# EAGLE board Geiger_old (EAGLE 5.06)
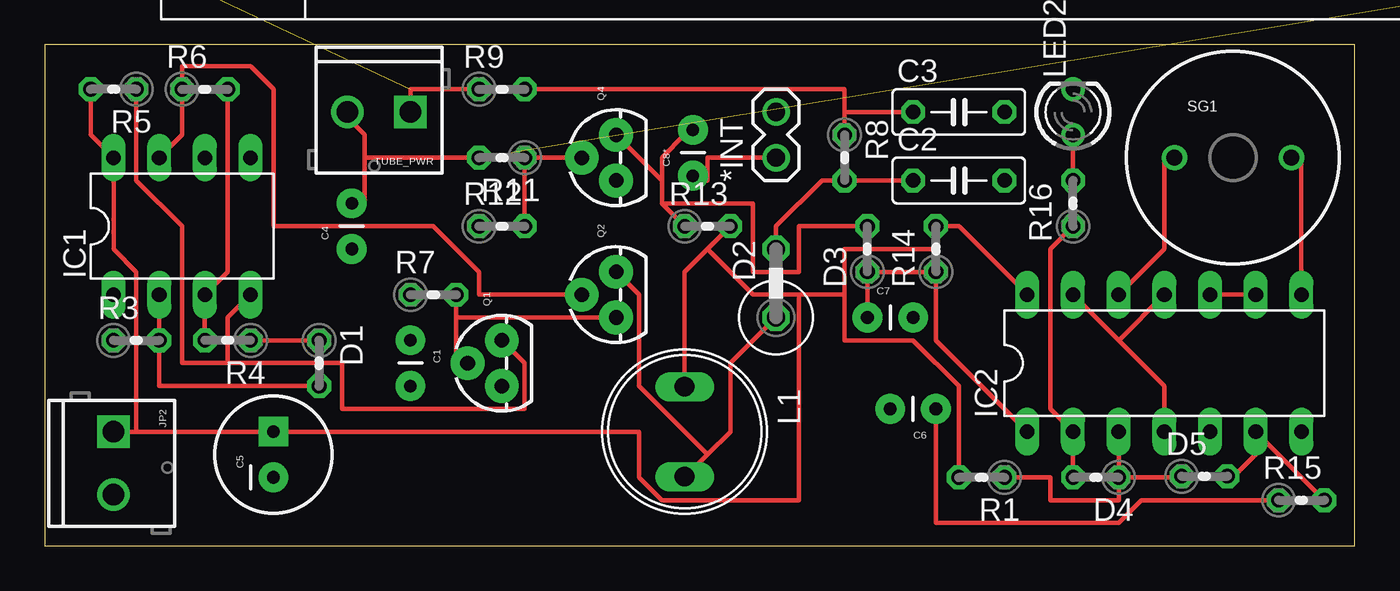
[diagram p0: board, top side]
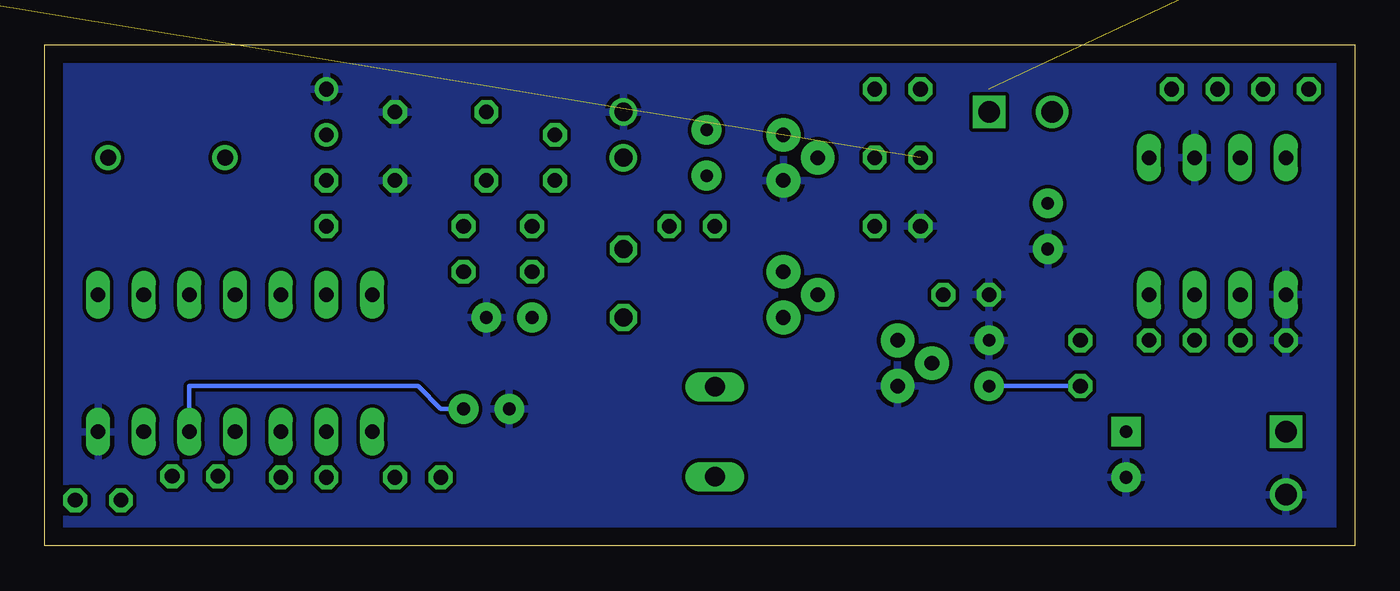
[diagram p1: board, bottom side, seen from below]

Size 72.8 x 27.86 mm. Coordinates in mm from the lower left corner, seen from the top.
Outline: 0,0 72.8,0 72.8,27.86 0,27.86 0,0
Copper layers (1*16): Top 0.035mm / dielectric 1.5mm / Bottom 0.035mm
Design rules "default": minimum track width 10mil, minimum drill 24mil, track to track 8mil, track to pad 8mil, pad to pad 8mil, via to via 8mil, smd to smd 8mil, copper to edge 40mil, drill to drill 8mil, minimum pad ring 10mil, minimum via ring 8mil, stop-mask expansion 4mil, vias tented up to drill 0mil, thermal gap 10mil

## Footprints (pad centres in the part's own frame; a part is rotated, then mirrored left to right if it is on the bottom)
1X02 = drill 1.016 round: 1 0,0; 2 2.54,0
CAP-PTH-SMALL = drill 0.7 pad 1.651 round: 1 0,0; 2 2.54,0
C050-025X075 = drill 0.813 octagon: 1 -2.54,0; 2 2.54,0
CPOL-RADIAL-100UF-25V = drill 0.7 pad 1.651 square: 1 1.27,0 | drill 0.7 pad 1.651 round: 2 -1.27,0
0204V = drill 0.813 octagon: 1 -1.27,0; 2 1.27,0
VERT_DIODE = drill 1 octagon: 1 -2.54,0; 2 1.27,0
GEIGER_TUBE_SBM-20 = smd 6.35 x 3.81: + -48.26,2.54; - 52.07,2.54
DIL08 = drill 0.813 long: 1 -3.81,-3.81; 2 -1.27,-3.81; 3 1.27,-3.81; 4 3.81,-3.81; 5 3.81,3.81; 6 1.27,3.81; 7 -1.27,3.81; 8 -3.81,3.81
DIL14 = drill 0.813 long: 1 -7.62,-3.81; 2 -5.08,-3.81; 3 -2.54,-3.81; 4 0,-3.81; 5 2.54,-3.81; 6 5.08,-3.81; 7 7.62,-3.81; 8 7.62,3.81; 9 5.08,3.81; 10 2.54,3.81; 11 0,3.81; 12 -2.54,3.81; 13 -5.08,3.81; 14 -7.62,3.81
SCREWTERMINAL-3.5MM-2 = drill 1.2 square: 1 0,0 | drill 1.2 round: 2 3.5,0
.32IN_RADIAL = drill 1.1 long: 1 -2.5,0; 2 2.5,0
LED3MM = drill 0.813 round: A -1.27,0; K 1.27,0
TO-92 = drill 0.813 pad 1.88 round: 1 -1.27,0; 2 0,1.905; 3 1.27,0
BUZZER-12MM = drill 0.9 round: + 3.25,0; - -3.25,0

## Placement (x,y rotation side)
*INT  [1X02]  40.64,21.59 90 top
C1  .001uF  [CAP-PTH-SMALL]  20.32,11.43 270 top
C2  .01uF/600V  [C050-025X075]  50.8,20.32 0 top
C3  .01uF/600V  [C050-025X075]  50.8,24.13 0 top
C4  300pF  [CAP-PTH-SMALL]  17.05,16.51 90 top
C5  100uF  [CPOL-RADIAL-100UF-25V]  12.7,5.08 90 top
C6  .02uF  [CAP-PTH-SMALL]  49.53,7.62 180 top
C7  .1uF  [CAP-PTH-SMALL]  45.72,12.7 0 top
C8*  .1uF  [CAP-PTH-SMALL]  36.02,20.59 90 top
D1  1N4148  [0204V]  15.24,10.16 270 top
D2  600V_HE_DIODE  [VERT_DIODE]  40.64,15.24 90 top
D3  1N4148  [0204V]  45.72,16.51 90 top
D4  1N4148  [0204V]  58.42,3.81 180 top
D5  1N4148  [0204V]  64.46,3.87 0 top
GT1  GIEGER_TUBE-SSBM-20  [GEIGER_TUBE_SBM-20]  49.53,31.84 0 top  (outside the outline)
IC1  LM555N  [DIL08]  7.62,17.78 0 top
IC2  74ACT(HC)14N  [DIL14]  62.23,10.16 0 top
JP2  [SCREWTERMINAL-3.5MM-2]  3.81,6.35 270 top
L1  4.7-10mH  [.32IN_RADIAL]  35.56,6.35 270 top
LED2  [LED3MM]  57.15,24.13 90 top
Q1  2N2222  [TO-92]  25.4,10.16 90 top
Q2  MPSA42  [TO-92]  31.75,13.97 90 top
Q4  2N2222  [TO-92]  31.75,21.59 90 top
R1  100K  [0204V]  52.07,3.81 180 top
R3  220K  [0204V]  5.08,11.43 0 top
R4  330  [0204V]  10.16,11.43 180 top
R5  100K  [0204V]  3.81,25.4 180 top
R6  3.9K  [0204V]  8.89,25.4 0 top
R7  15  [0204V]  21.59,13.97 0 top
R8  1M  [0204V]  44.45,21.59 270 top
R9  4.7M  [0204V]  25.4,25.4 0 top
R11  22K  [0204V]  25.4,21.59 180 top
R12  22K  [0204V]  25.4,17.78 0 top
R13  10K  [0204V]  36.83,17.78 0 top
R14  470K  [0204V]  49.53,16.51 90 top
R15  22K  [0204V]  69.85,2.54 0 top
R16  1.5K  [0204V]  57.15,19.05 90 top
SG1  Piezo  [BUZZER-12MM]  66.04,21.59 0 top
TUBE_PWR  [SCREWTERMINAL-3.5MM-2]  20.32,24.13 180 top

## Library data of the parts
*INT D1-D5 GT1 JP2 L1 TUBE_PWR = _JJG-parts
C1 C4-C7 C8* LED2 Q1 Q2 Q4 SG1 = SparkFun
C2 C3 = resistor
IC1 = linear
IC2 = 74xx-us
R1 R3-R9 R11-R16 = rcl

## Nets
GND: *INT.2 C1.1 C2.2 C3.2 C4.1 C5.2 C6.2 C7.2 IC1.1 IC1.6 IC2.7 JP2.2 LED2.K Q1.1 Q4.1 R3.1 R7.1 R12.1
N$1: IC1.3 R4.2 R6.2
N$2: C2.1 D2.2 R8.2
N$3: C7.1 D3.1 IC2.1 R14.1
N$4: C1.2 D1.2 IC1.2 R3.2
N$5: C4.2 GT1.- R11.2 TUBE_PWR.2
N$6: C3.1 R8.1 R9.2
N$7: GT1.+ R9.1 TUBE_PWR.1
N$8: Q4.2 R11.1 R12.2
N$9: D4.2 IC2.2 R16.1
N$10: IC1.7 Q2.2 R6.1
N$11: D4.1 D5.1 IC2.3 R1.1
N$12: IC1.4 Q1.3 R5.1
N$13: D1.1 R4.1
N$14: C8*.2 D3.2 Q4.3 R13.1
N$15: Q1.2 Q2.1 R7.2
N$16: *INT.1 C8*.1
N$17: D2.1 L1.2 Q2.3
N$18: IC2.9 IC2.10
N$19: D5.2 IC2.6 R15.2
N$21: C6.1 IC2.5 R15.1
N$22: IC2.4 IC2.11 IC2.13
N$24: IC2.12 SG1.-
N$26: IC2.8 SG1.+
N$27: LED2.A R16.2
VCC: C5.1 IC1.8 IC2.14 JP2.1 L1.1 R1.2 R5.2 R13.2 R14.2

## Tracks (layer width: path | path; a pad name or v marks a point on that pad's centre or on a via)
GND
  pour Bottom: 0,27.94 72.39,27.94 72.39,0 0,0
N$1
  Top 0.254: R4.2 IC1.3 10.16,15.24 R6.2
N$2
  Top 0.254: C2.1 R8.2 43.18,20.32 40.64,17.78 D2.2
N$3
  Top 0.254: C7.1 D3.1 R14.1 49.53,11.43 IC2.1
N$4
  Top 0.254: IC1.2 R3.2 6.35,8.89 D1.2
  Bottom 0.254: D1.2 C1.2
N$5  (1 unrouted)
  Top 0.254: 17.78,21.59 R11.2 | 17.78,21.59 17.78,19.05 C4.2 | 17.78,21.59 17.78,22.86 16.51,24.13 TUBE_PWR.2
N$6
  Top 0.254: R9.2 44.45,25.4 44.45,24.13 | 44.45,24.13 R8.1 | 44.45,24.13 C3.1
N$7  (1 unrouted)
  Top 0.254: R9.1 20.32,25.4 TUBE_PWR.1
N$8
  Top 0.254: R12.2 R11.1 Q4.2
N$9
  Top 0.254: D4.2 IC2.2 55.88,7.62 55.88,16.51 R16.1
N$10
  Top 0.254: IC1.7 7.62,22.86 R6.1 7.62,26.67 11.43,26.67 12.7,25.4 12.7,17.78 21.59,17.78 24.13,15.24 24.13,13.97 Q2.2
N$11
  Top 0.254: R1.1 55.88,3.81 55.88,2.54 59.69,2.54 D4.1 | D4.1 IC2.3 | D4.1 63.5,3.81 D5.1
N$12
  Top 0.254: IC1.4 10.16,12.7 10.16,10.16 | 10.16,10.16 7.62,10.16 7.62,17.78 5.08,20.32 R5.1 | Q1.3 26.67,10.16 26.67,7.62 16.51,7.62 16.51,10.16 10.16,10.16
N$13
  Top 0.254: R4.1 D1.1
N$14
  Top 0.254: 34.29,19.05 R13.1 | 34.29,20.32 34.29,21.59 35.56,22.86 C8*.2 | 34.29,19.05 34.29,20.32 | D3.2 41.91,17.78 41.91,15.24 39.37,15.24 39.37,19.05 34.29,19.05 | 34.29,20.32 Q4.3
N$15
  Top 0.254: 22.86,12.7 22.86,10.16 Q1.2 | 22.86,12.7 R7.2 | 22.86,12.7 Q2.1
N$16
  Top 0.254: *INT.1 36.83,21.59 36.83,20.32 C8*.1
N$17
  Top 0.254: D2.1 38.1,10.16 38.1,6.35 36.83,5.08 | 36.83,5.08 35.56,3.81 L1.2 | Q2.3 33.02,13.97 33.02,8.89 36.83,5.08
N$18
  Top 0.254: IC2.10 IC2.9
N$19
  Top 0.254: D5.2 66.04,3.81 67.31,5.08 IC2.6 R15.2
N$21
  Top 0.254: R15.1 60.96,2.54 59.69,1.27 49.53,1.27 C6.1
  Bottom 0.254: IC2.5 64.77,8.89 52.07,8.89 50.8,7.62 C6.1
N$22
  Top 0.254: 59.69,11.43 62.23,8.89 IC2.4 | 59.69,11.43 IC2.13 | 59.69,11.43 IC2.11
N$24
  Top 0.254: IC2.12 62.23,16.51 62.23,21.59 SG1.-
N$26
  Top 0.254: IC2.8 69.85,21.59 SG1.+
N$27
  Top 0.254: R16.2 LED2.A
VCC
  Top 0.254: R5.2 2.54,22.86 IC1.8 3.81,16.51 5.08,15.24 5.08,6.35 | JP2.1 5.08,6.35 | 5.08,6.35 C5.1 33.02,6.35 33.02,3.81 34.29,2.54 41.91,2.54 41.91,13.97 | 36.83,16.51 35.56,15.24 L1.1 | 36.83,16.51 R13.2 | R1.2 50.8,8.89 48.26,11.43 44.45,11.43 44.45,13.97 | 44.45,13.97 44.45,16.51 49.53,16.51 R14.2 50.8,17.78 IC2.14 | 36.83,16.51 39.37,13.97 41.91,13.97 | 41.91,13.97 44.45,13.97